# EAGLE board CT_schematic (EAGLE 7.6.0)

Size 100 x 80 mm. Coordinates in mm from the lower left corner, seen from the top.
Outline: 0,0 100,0 100,80 0,80 0,0
Copper layers (1*16): Top 0.035mm / dielectric 1.5mm / Bottom 0.035mm
Design rules "default": minimum track width 10mil, minimum drill 24mil, track to track 8mil, track to pad 8mil, pad to pad 8mil, via to via 8mil, smd to smd 8mil, copper to edge 40mil, drill to drill 8mil, minimum pad ring 10mil, minimum via ring 8mil, stop-mask expansion 4mil, vias tented up to drill 0mil, thermal gap 10mil

## Footprints (pad centres in the part's own frame; a part is rotated, then mirrored left to right if it is on the bottom)
C0603 = smd 0.8 x 0.8: 1 -0.762,0; 2 0.762,0
C0402 = smd 0.5 x 0.5: 1 -0.508,0; 2 0.508,0
C0805 = smd 1.2 x 1.3: 1 -1.016,0; 2 1.016,0
2220 = smd 1.85 x 5.5: 1 -2.55,0; 2 2.55,0
EXV-9H = smd 3.505 x 1.676: 1 -2.857,0; 2 2.857,0
L0603 = smd 0.8 x 0.8: 1 -0.762,0; 2 0.762,0
DR1040 = smd 1.6 x 3.2: 1 -4.458,0; 2 4.458,0
PJ-037B_PACKAGE = drill 3.7 square: 1 12,0 | drill 3.2 square: 2 6,0
R0603 = smd 0.8 x 0.8: 1 -0.762,0; 2 0.762,0
UFBGA176_25 = smd 0.3 x 0.3: A1 -4.55,4.55; A2 -3.9,4.55; A3 -3.25,4.55; A4 -2.6,4.55; A5 -1.95,4.55; A6 -1.3,4.55; A7 -0.65,4.55; A8 0,4.55; A9 0.65,4.55; A10 1.3,4.55; A11 1.95,4.55; A12 2.6,4.55; A13 3.25,4.55; A14 3.9,4.55; A15 4.55,4.55; B1 -4.55,3.9; B2 -3.9,3.9; B3 -3.25,3.9; B4 -2.6,3.9; B5 -1.95,3.9; B6 -1.3,3.9; B7 -0.65,3.9; B8 0,3.9; B9 0.65,3.9; B10 1.3,3.9; B11 1.95,3.9; B12 2.6,3.9; B13 3.25,3.9; B14 3.9,3.9; B15 4.55,3.9; C1 -4.55,3.25; C2 -3.9,3.25; C3 -3.25,3.25; C4 -2.6,3.25; C5 -1.95,3.25; C6 -1.3,3.25; C7 -0.65,3.25; C8 0,3.25; C9 0.65,3.25; C10 1.3,3.25; C11 1.95,3.25; C12 2.6,3.25; C13 3.25,3.25; C14 3.9,3.25; C15 4.55,3.25; D1 -4.55,2.6; D2 -3.9,2.6; D3 -3.25,2.6; D4 -2.6,2.6; D5 -1.95,2.6; D6 -1.3,2.6; D7 -0.65,2.6; D8 0,2.6; D9 0.65,2.6; D10 1.3,2.6; D11 1.95,2.6; D12 2.6,2.6; D13 3.25,2.6; D14 3.9,2.6; D15 4.55,2.6; E1 -4.55,1.95; E2 -3.9,1.95; E3 -3.25,1.95; E4 -2.6,1.95; E12 2.6,1.95; E13 3.25,1.95; E14 3.9,1.95; E15 4.55,1.95; F1 -4.55,1.3; F2 -3.9,1.3; F3 -3.25,1.3; F4 -2.6,1.3; F6 -1.3,1.3; F7 -0.65,1.3; F8 0,1.3; F9 0.65,1.3; F10 1.3,1.3; F12 2.6,1.3; F13 3.25,1.3; F14 3.9,1.3; F15 4.55,1.3; G1 -4.55,0.65; G2 -3.9,0.65; G3 -3.25,0.65; G4 -2.6,0.65; G6 -1.3,0.65; G7 -0.65,0.65; G8 0,0.65; G9 0.65,0.65; G10 1.3,0.65; G12 2.6,0.65; G13 3.25,0.65; G14 3.9,0.65; G15 4.55,0.65; H1 -4.55,0; H2 -3.9,0; H3 -3.25,0; H4 -2.6,0; H6 -1.3,0; H7 -0.65,0; H8 0,0; H9 0.65,0; H10 1.3,0; H12 2.6,0; H13 3.25,0; H14 3.9,0; H15 4.55,0; J1 -4.55,-0.65; J2 -3.9,-0.65; J3 -3.25,-0.65; J4 -2.6,-0.65; J6 -1.3,-0.65; J7 -0.65,-0.65; J8 0,-0.65; J9 0.65,-0.65; J10 1.3,-0.65; J12 2.6,-0.65; J13 3.25,-0.65; J14 3.9,-0.65; J15 4.55,-0.65; K1 -4.55,-1.3; K2 -3.9,-1.3; K3 -3.25,-1.3; K4 -2.6,-1.3; K6 -1.3,-1.3; K7 -0.65,-1.3; K8 0,-1.3; K9 0.65,-1.3; K10 1.3,-1.3; K12 2.6,-1.3; K13 3.25,-1.3; K14 3.9,-1.3; K15 4.55,-1.3; L1 -4.55,-1.95; L2 -3.9,-1.95; L3 -3.25,-1.95; L4 -2.6,-1.95; L12 2.6,-1.95; L13 3.25,-1.95; L14 3.9,-1.95; L15 4.55,-1.95; M1 -4.55,-2.6; M2 -3.9,-2.6; M3 -3.25,-2.6; M4 -2.6,-2.6; M5 -1.95,-2.6; M6 -1.3,-2.6; M7 -0.65,-2.6; M8 0,-2.6; M9 0.65,-2.6; M10 1.3,-2.6; M11 1.95,-2.6; M12 2.6,-2.6; M13 3.25,-2.6; M14 3.9,-2.6; M15 4.55,-2.6; N1 -4.55,-3.25; N2 -3.9,-3.25; N3 -3.25,-3.25; N4 -2.6,-3.25; N5 -1.95,-3.25; N6 -1.3,-3.25; N7 -0.65,-3.25; N8 0,-3.25; N9 0.65,-3.25; N10 1.3,-3.25; N11 1.95,-3.25; N12 2.6,-3.25; N13 3.25,-3.25; N14 3.9,-3.25; N15 4.55,-3.25; P1 -4.55,-3.9; P2 -3.9,-3.9; P3 -3.25,-3.9; P4 -2.6,-3.9; P5 -1.95,-3.9; P6 -1.3,-3.9; P7 -0.65,-3.9; P8 0,-3.9; P9 0.65,-3.9; P10 1.3,-3.9; P11 1.95,-3.9; P12 2.6,-3.9; P13 3.25,-3.9; P14 3.9,-3.9; P15 4.55,-3.9; R1 -4.55,-4.55; R2 -3.9,-4.55; R3 -3.25,-4.55; R4 -2.6,-4.55; R5 -1.95,-4.55; R6 -1.3,-4.55; R7 -0.65,-4.55; R8 0,-4.55; R9 0.65,-4.55; R10 1.3,-4.55; R11 1.95,-4.55; R12 2.6,-4.55; R13 3.25,-4.55; R14 3.9,-4.55; R15 4.55,-4.55
SOIC-8 = smd 1.6 x 0.6: 1 -2.7,1.905 | smd 1.55 x 0.6: 2 -2.7,0.635; 3 -2.7,-0.635; 4 -2.7,-1.905; 5 2.7,-1.905; 6 2.7,-0.635; 7 2.7,0.635; 8 2.7,1.905
TST-110-05-T-D-RA = drill 1 pad 1.7 square: 1 0,0 | drill 1 pad 1.7: 2 0,2.54; 3 2.54,0; 4 2.54,2.54; 5 5.08,0; 6 5.08,2.54; 7 7.62,0; 8 7.62,2.54; 9 10.16,0; 10 10.16,2.54; 11 12.7,0; 12 12.7,2.54; 13 15.24,0; 14 15.24,2.54; 15 17.78,0; 16 17.78,2.54; 17 20.32,0; 18 20.32,2.54; 19 22.86,0; 20 22.86,2.54
TH58NVG3S0HBAI4 = smd 0.46 x 0.46: A1 -5.6,2.4; A2 -5.6,1.6; A9 -5.6,-5.6; A10 -5.6,-6.4; B1 -4.8,2.4; B9 -4.8,-5.6; B10 -4.8,-6.4; C3 -4,0.8; C4 -3.2,0.8; C5 -2.4,0.8; C6 -1.6,0.8; C7 -0.8,0.8; C8 0,0.8; D3 -4,0; D4 -3.2,0; D5 -2.4,0; D6 -1.6,0; D7 -0.8,0; D8 0,0; E3 -4,-0.8; E4 -3.2,-0.8; E5 -2.4,-0.8; E6 -1.6,-0.8; E7 -0.8,-0.8; E8 0,-0.8; F3 -4,-1.6; F4 -3.2,-1.6; F5 -2.4,-1.6; F6 -1.6,-1.6; F7 -0.8,-1.6; F8 0,-1.6; G3 -4,-2.4; G4 -3.2,-2.4; G5 -2.4,-2.4; G6 -1.6,-2.4; G7 -0.8,-2.4; G8 0,-2.4; H3 -4,-3.2; H4 -3.2,-3.2; H5 -2.4,-3.2; H6 -1.6,-3.2; H7 -0.8,-3.2; H8 0,-3.2; J3 -4,-4; J4 -3.2,-4; J5 -2.4,-4; J6 -1.6,-4; J7 -0.8,-4; J8 0,-4; K3 -4,-4.8; K4 -3.2,-4.8; K5 -2.4,-4.8; K6 -1.6,-4.8; K7 -0.8,-4.8; K8 0,-4.8; L1 0.8,2.4; L2 0.8,1.6; L9 0.8,-5.6; L10 0.8,-6.4; M1 1.6,2.4; M2 1.6,1.6; M9 1.6,-5.6; M10 1.6,-6.4
ABS07-32.768KHZ-7-T = smd 1.1 x 2.4: 1 -2.5,0; 2 0,0
ASFL1 = smd 1.7 x 1.5: 1 -1.27,-1.1; 2 1.27,-1.1; 3 1.27,1.1; 4 -1.27,1.1
QFN-16_EP = smd 0.805 x 0.3: 1 -1.452,0.75; 2 -1.452,0.25; 3 -1.452,-0.25; 4 -1.452,-0.75; 9 1.452,-0.75; 10 1.452,-0.25; 11 1.452,0.25; 12 1.452,0.75 | smd 0.3 x 0.805: 5 -0.75,-1.452; 6 -0.25,-1.452; 7 0.25,-1.452; 8 0.75,-1.452; 13 0.75,1.452; 14 0.25,1.452; 15 -0.25,1.452; 16 -0.75,1.452 | smd 1.55 x 1.55: 17 0,0
SON-6 = smd 0.55 x 0.3: 1 -0.355,0.5 | smd 0.52 x 0.3: 2 -0.37,0; 3 -0.37,-0.5; 4 0.37,-0.5; 5 0.37,0; 6 0.37,0.5
SW_4-1437565-2 = smd 1.4 x 2.1: 1 -2.23,4.55; 2 -2.23,-4.55; 3 2.23,4.55; 4 2.23,-4.55
LGM67K-G1J2-24-Z = smd 0.8 x 1.4: A -2,0; C 0,0
NC7SZ125M5X = smd 1.3 x 0.7: 1 -1.3,0.95; 2 -1.3,0; 3 -1.3,-0.95; 4 1.3,-0.95; 5 1.3,0.95

## Placement (x,y rotation side)
C1  1e-06  [C0603]  -71.12,60.96 0 top  (outside the outline)
C2  1e-07  [C0603]  -15.24,66.04 0 top  (outside the outline)
C3  1e-07  [C0603]  -19.05,66.04 0 top  (outside the outline)
C4  1e-07  [C0603]  -22.86,66.04 0 top  (outside the outline)
C5  1e-07  [C0603]  -26.67,66.04 0 top  (outside the outline)
C6  1e-07  [C0603]  -30.48,66.04 0 top  (outside the outline)
C7  1e-07  [C0603]  -34.29,66.04 0 top  (outside the outline)
C8  1e-07  [C0603]  -38.1,66.04 0 top  (outside the outline)
C9  1e-07  [C0603]  -41.91,66.04 0 top  (outside the outline)
C10  1e-07  [C0603]  -45.72,66.04 0 top  (outside the outline)
C11  1e-07  [C0603]  -49.53,66.04 0 top  (outside the outline)
C12  1e-07  [C0603]  -53.34,66.04 0 top  (outside the outline)
C13  1e-07  [C0603]  -57.15,66.04 0 top  (outside the outline)
C14  1e-07  [C0603]  -60.96,66.04 0 top  (outside the outline)
C15  1e-07  [C0603]  -64.77,66.04 0 top  (outside the outline)
C16  1e-07  [C0603]  -68.58,66.04 0 top  (outside the outline)
C17  4.7e-06  [C0603]  -59.69,60.96 0 top  (outside the outline)
C18  1e-08  [C0603]  -15.24,71.12 0 top  (outside the outline)
C19  1e-06  [C0603]  -19.05,71.12 0 top  (outside the outline)
C20  1e-07  [C0603]  -22.86,71.12 0 top  (outside the outline)
C21  1e-07  [C0603]  -26.67,71.12 0 top  (outside the outline)
C22  2.2e-06  [C0603]  -63.5,60.96 0 top  (outside the outline)
C23  2.2e-06  [C0603]  -67.31,60.96 0 top  (outside the outline)
C24  1e-11  [C0402]  -57.15,71.12 0 top  (outside the outline)
C25  1e-11  [C0402]  -60.96,71.12 0 top  (outside the outline)
C26  1e-08  [C0402]  -64.77,71.12 0 top  (outside the outline)
C27  1e-08  [C0402]  -68.58,71.12 0 top  (outside the outline)
C28  1e-07  [C0402]  -15.24,76.2 0 top  (outside the outline)
C29  1e-05  [C0805]  -60.96,48.26 0 top  (outside the outline)
C30  1e-07  [C0402]  -19.05,76.2 0 top  (outside the outline)
C31  1e-07  [C0402]  -22.86,76.2 0 top  (outside the outline)
C32  1e-08  [C0402]  -26.67,76.2 0 top  (outside the outline)
C33  1e-05  [C0805]  -66.04,48.26 0 top  (outside the outline)
C34  1e-06  [C0603]  -30.48,71.12 0 top  (outside the outline)
C35  1e-07  [C0402]  -30.48,76.2 0 top  (outside the outline)
C36  6.8e-05  [2220]  -33.02,33.02 0 top  (outside the outline)
C37  1e-07  [C0402]  -34.29,76.2 0 top  (outside the outline)
C38  0.0001  [EXV-9H]  -54.61,41.91 0 top  (outside the outline)
C39  0.0001  [EXV-9H]  -66.04,41.91 0 top  (outside the outline)
C40  1e-08  [C0402]  -38.1,76.2 0 top  (outside the outline)
C41  1e-08  [C0402]  -41.91,76.2 0 top  (outside the outline)
F1  240.0  [L0603]  -34.29,71.12 0 top  (outside the outline)
I1  3.8e-06  [DR1040]  -38.1,21.59 0 top  (outside the outline)
J1  PJ-037B  [PJ-037B_PACKAGE]  -59.69,7.62 0 top  (outside the outline)
R2  1000.0  [R0603]  -38.1,71.12 0 top  (outside the outline)
R7  4700.0  [R0603]  -41.91,71.12 0 top  (outside the outline)
R8  10000.0  [R0603]  -25.4,55.88 0 top  (outside the outline)
R9  10000.0  [R0603]  -30.48,55.88 0 top  (outside the outline)
R10  10000.0  [R0603]  -35.56,55.88 0 top  (outside the outline)
R11  10000.0  [R0603]  -40.64,55.88 0 top  (outside the outline)
R12  10000.0  [R0603]  -45.72,55.88 0 top  (outside the outline)
R13  10000.0  [R0603]  -50.8,55.88 0 top  (outside the outline)
R14  10000.0  [R0603]  -55.88,55.88 0 top  (outside the outline)
R15  10000.0  [R0603]  -60.96,55.88 0 top  (outside the outline)
R16  10000.0  [R0603]  -66.04,55.88 0 top  (outside the outline)
R17  10000.0  [R0603]  -71.12,55.88 0 top  (outside the outline)
R18  10000.0  [R0603]  -15.24,60.96 0 top  (outside the outline)
R19  10000.0  [R0603]  -20.32,60.96 0 top  (outside the outline)
R20  10000.0  [R0603]  -25.4,60.96 0 top  (outside the outline)
R21  10000.0  [R0603]  -30.48,60.96 0 top  (outside the outline)
R22  10000.0  [R0603]  -35.56,60.96 0 top  (outside the outline)
R23  20000.0  [R0603]  -40.64,60.96 0 top  (outside the outline)
R24  91000.0  [R0603]  -45.72,60.96 0 top  (outside the outline)
R25  300000.0  [R0603]  -71.12,48.26 0 top  (outside the outline)
R26  10000.0  [R0603]  -50.8,60.96 0 top  (outside the outline)
R27  10000.0  [R0603]  -55.88,60.96 0 top  (outside the outline)
R28  9100.0  [R0603]  -45.72,71.12 0 top  (outside the outline)
R29  680000.0  [R0603]  -15.24,55.88 0 top  (outside the outline)
R30  120000.0  [R0603]  -20.32,55.88 0 top  (outside the outline)
U1  STM32F765IGK6  [UFBGA176_25]  -36.83,6.35 0 top  (outside the outline)
U2  AT25040B-SSHL-T  [SOIC-8]  -55.88,20.32 0 top  (outside the outline)
U3  AT25M02-SSHD-T  [SOIC-8]  -24.13,33.02 0 top  (outside the outline)
U4  TST-110-05-T-D-RA  [TST-110-05-T-D-RA]  -46.99,39.37 0 top  (outside the outline)
U5  TH58NVG3S0HBAI4  [TH58NVG3S0HBAI4]  -24.13,10.16 0 top  (outside the outline)
U6  ABS07-32.768KHZ-7-T  [ABS07-32.768KHZ-7-T]  -27.94,49.53 0 top  (outside the outline)
U7  ASFL1-25MHZ-NCS  [ASFL1]  -50.8,31.75 0 top  (outside the outline)
U8  LTC3601EUD#PBF  [QFN-16_EP]  -50.8,71.12 0 top  (outside the outline)
U9  TPS3895ADRYR  [SON-6]  -44.45,74.93 0 top  (outside the outline)
U10  4-1437565-2  [SW_4-1437565-2]  -27.94,21.59 0 top  (outside the outline)
U11  Q65110A2395  [LGM67K-G1J2-24-Z]  -36.83,49.53 0 top  (outside the outline)
U12  nc7sz125m5x  [NC7SZ125M5X]  -48.26,48.26 0 top  (outside the outline)
U13  nc7sz125m5x  [NC7SZ125M5X]  -54.61,48.26 0 top  (outside the outline)

## Library data of the parts
C1-C41 F1 I1 J1 R2 R7-R30 U1-U13 = circuit_tree

## Nets
CLK_CRYSTAL_U1_E1: C24.1 U1.E1 U6.1
CLK_CRYSTAL_U1_F1: C25.1 U1.F1 U6.2
CLK_U1_G1: U1.G1 U7.3
GND: C1.2 C2.2 C3.2 C4.2 C5.2 C6.2 C7.2 C8.2 C9.2 C10.2 C11.2 C12.2 C13.2 C14.2 C15.2 C16.2 C17.2 C18.2 C19.2 C20.2 C21.2 C22.2 C23.2 C24.2 C25.2 C26.2 C27.2 C28.2 C29.2 C30.2 C31.2 C32.2 C33.2 C34.2 C36.1 C36.2 C37.2 C38.2 C39.2 C40.2 C41.2 J1.2 R2.2 R8.2 R10.2 R23.2 R25.2 R28.2 R30.2 U1.D5 U1.D7 U1.D8 U1.D9 U1.F2 U1.F6 U1.F7 U1.F8 U1.F9 U1.F10 U1.F12 U1.G2 U1.G6 U1.G7 U1.G8 U1.G9 U1.G10 U1.G12 U1.H6 U1.H7 U1.H8 U1.H9 U1.H10 U1.H12 U1.J6 U1.J7 U1.J8 U1.J9 U1.J10 U1.K6 U1.K7 U1.K8 U1.K9 U1.K10 U1.M1 U1.M8 U1.M9 U1.N1 U2.4 U3.4 U4.4 U4.6 U4.8 U4.10 U4.12 U4.14 U4.16 U4.18 U4.20 U5.C5 U5.K3 U5.K8 U7.2 U8.1 U8.9 U8.17 U9.2 U11.C U12.2 U12.3 U13.1 U13.3
NET_U1_C6: R9.1 U1.C6
NET_U1_D6: R8.1 U1.D6
NET_U1_F13: C23.1 U1.F13
NET_U1_J1: R7.1 U1.J1 U13.4
NET_U1_L4: R10.1 U1.L4
NET_U1_M10: C22.1 U1.M10
NET_U1_R1: C18.1 C19.1 F1.1 U1.P1 U1.R1
NET_U1_R14: U11.A
NET_U1_R15: U10.3 U10.4
NET_U2_3: R11.1 U2.3
NET_U2_7: R13.1 U2.7
NET_U3_3: R14.1 U3.3
NET_U3_7: R16.1 U3.7
NET_U5_C3: R21.1 U5.C3
NET_U8_3: C35.2 I1.1 U8.3 U8.4
NET_U8_6: C35.1 U8.6
NET_U8_7: C34.1 U8.7 U8.12
NET_U8_10: R25.1 U8.10
NET_U8_11: R23.1 R24.1 U8.11
NET_U8_14: U8.14
NET_U8_ATNET_3: I1.2 R24.2
NET_U9_1: R27.1 R28.1 U9.1
NET_U9_3: R29.2 R30.1 U9.3
NET_U9_4: R26.1 U9.4 U12.4 U13.2
NET_U10_1: R2.1 U10.1 U10.2
PROC_FMC_A16: U1.N14 U5.D5
PROC_FMC_A17: U1.N13 U5.C4
PROC_FMC_D0: U1.M14 U5.H4
PROC_FMC_D1: U1.L14 U5.J4
PROC_FMC_D2: U1.B12 U5.K4
PROC_FMC_D3: U1.C12 U5.K5
PROC_FMC_D4: U1.R8 U5.K6
PROC_FMC_D5: U1.P8 U5.J7
PROC_FMC_D6: U1.P9 U5.K7
PROC_FMC_D7: U1.R9 U5.J8
PROC_FMC_INT: R22.1 U1.J14 U5.C8
PROC_FMC_NCE: R18.1 U1.C10 U5.C6
PROC_FMC_NOE: R19.1 U1.D10 U5.D4
PROC_FMC_NWE: R20.1 U1.C11 U5.C7
PROC_SPI1_MISO: U1.A9 U2.2
PROC_SPI1_MOSI: U1.A6 U2.5
PROC_SPI1_NSS: R12.1 U1.A13 U2.1
PROC_SPI1_SCK: U1.B9 U2.6
PROC_SPI2_MISO: U1.C14 U3.2
PROC_SPI2_MOSI: U1.C13 U3.5
PROC_SPI2_NSS: R15.1 U1.B4 U3.1
PROC_SPI2_SCK: U1.B15 U3.6
PROC_SYS_JTCK_SWCLK: U1.A14 U4.9
PROC_SYS_JTDO_SWO: U1.A10 U4.13
PROC_SYS_JTMS_SWDIO: U1.A15 U4.7
RST_OUT_U4_SRESET_B: R17.1 U4.15 U12.1
VCC_S1_7V4: C33.1 C38.1 C39.1 J1.1 U8.15 U8.16
VCC_TIER1_3V3: C1.1 C2.1 C3.1 C4.1 C5.1 C6.1 C7.1 C8.1 C9.1 C10.1 C11.1 C12.1 C13.1 C14.1 C15.1 C16.1 C17.1 C20.1 C21.1 C26.1 C27.1 C28.1 C29.1 C30.1 C31.1 C32.1 C36.2 C37.1 C40.1 C41.1 F1.2 I1.2 R7.2 R9.2 R11.2 R12.2 R13.2 R14.2 R15.2 R16.2 R17.2 R18.2 R19.2 R20.2 R21.2 R22.2 R24.2 R26.2 R27.2 R29.1 U1.C1 U1.C5 U1.C7 U1.C8 U1.C9 U1.F3 U1.G3 U1.G13 U1.H13 U1.J12 U1.J13 U1.K4 U1.N8 U1.N9 U1.N10 U2.8 U3.8 U4.1 U5.H8 U5.J6 U7.4 U8.8 U9.6 U12.5 U13.5

## Tracks (layer width: path | path; a pad name or v marks a point on that pad's centre or on a via)
CLK_CRYSTAL_U1_E1  (2 unrouted)
CLK_CRYSTAL_U1_F1  (2 unrouted)
CLK_U1_G1  (1 unrouted)
GND  (110 unrouted)
NET_U1_C6  (1 unrouted)
NET_U1_D6  (1 unrouted)
NET_U1_F13  (1 unrouted)
NET_U1_J1  (2 unrouted)
NET_U1_L4  (1 unrouted)
NET_U1_M10  (1 unrouted)
NET_U1_R1  (4 unrouted)
NET_U1_R15  (1 unrouted)
NET_U2_3  (1 unrouted)
NET_U2_7  (1 unrouted)
NET_U3_3  (1 unrouted)
NET_U3_7  (1 unrouted)
NET_U5_C3  (1 unrouted)
NET_U8_3  (3 unrouted)
NET_U8_6  (1 unrouted)
NET_U8_7  (2 unrouted)
NET_U8_10  (1 unrouted)
NET_U8_11  (2 unrouted)
NET_U8_ATNET_3  (1 unrouted)
NET_U9_1  (2 unrouted)
NET_U9_3  (2 unrouted)
NET_U9_4  (3 unrouted)
NET_U10_1  (2 unrouted)
PROC_FMC_A16  (1 unrouted)
PROC_FMC_A17  (1 unrouted)
PROC_FMC_D0  (1 unrouted)
PROC_FMC_D1  (1 unrouted)
PROC_FMC_D2  (1 unrouted)
PROC_FMC_D3  (1 unrouted)
PROC_FMC_D4  (1 unrouted)
PROC_FMC_D5  (1 unrouted)
PROC_FMC_D6  (1 unrouted)
PROC_FMC_D7  (1 unrouted)
PROC_FMC_INT  (2 unrouted)
PROC_FMC_NCE  (2 unrouted)
PROC_FMC_NOE  (2 unrouted)
PROC_FMC_NWE  (2 unrouted)
PROC_SPI1_MISO  (1 unrouted)
PROC_SPI1_MOSI  (1 unrouted)
PROC_SPI1_NSS  (2 unrouted)
PROC_SPI1_SCK  (1 unrouted)
PROC_SPI2_MISO  (1 unrouted)
PROC_SPI2_MOSI  (1 unrouted)
PROC_SPI2_NSS  (2 unrouted)
PROC_SPI2_SCK  (1 unrouted)
PROC_SYS_JTCK_SWCLK  (1 unrouted)
PROC_SYS_JTDO_SWO  (1 unrouted)
PROC_SYS_JTMS_SWDIO  (1 unrouted)
RST_OUT_U4_SRESET_B  (2 unrouted)
VCC_S1_7V4  (5 unrouted)
VCC_TIER1_3V3  (74 unrouted)